# Altium PCB PCB.PcbDoc (part 2 of 2)
Units mm, origin at the board's own origin, x right, y up, seen from the top; angles counter-clockwise.
Board outline 210 x 83 mm, 4 copper layers (Top Layer, Inner Top, Inner Bottom, Bottom Layer), stack 1.536 mm thick; 158 components, 82 nets, 475 pads, 389 vias.
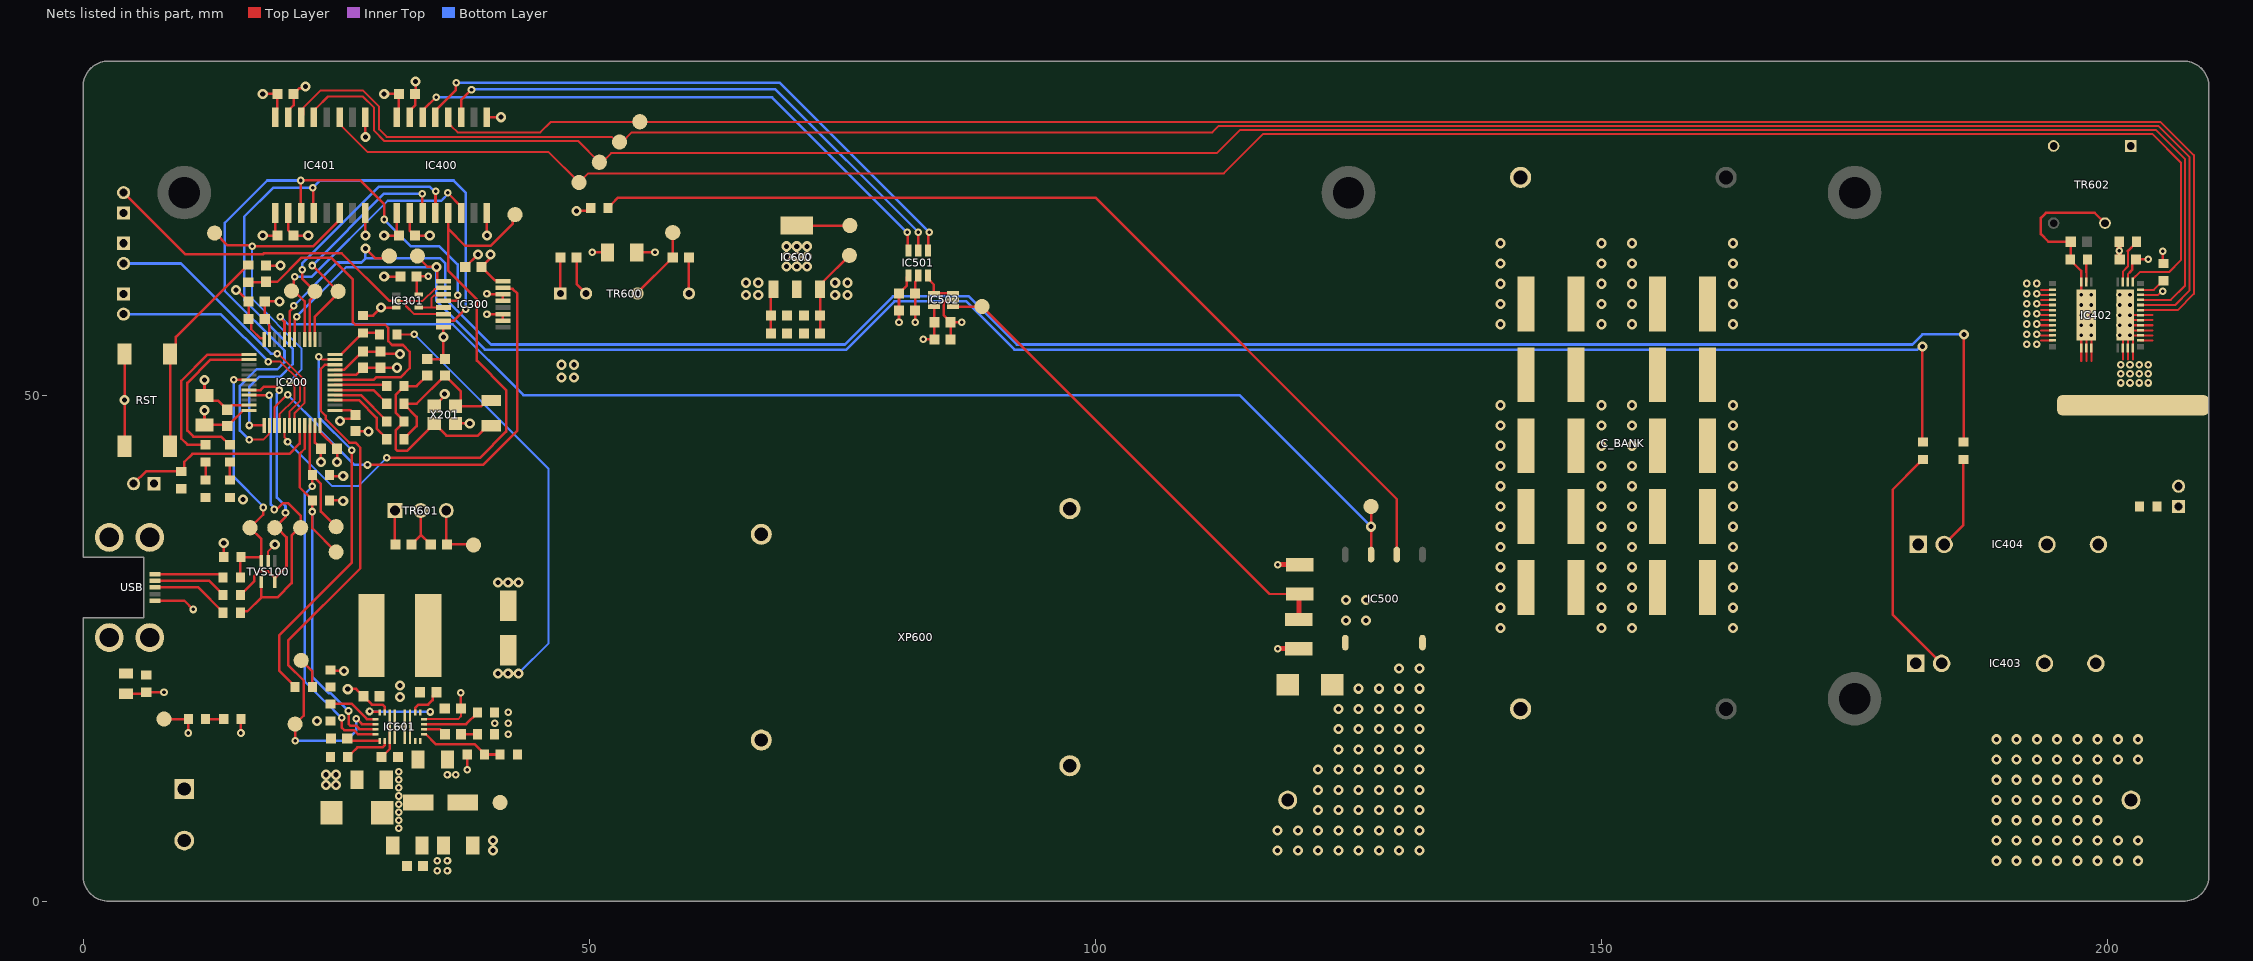
[diagram p4: the nets of this part, all layers, seen from the top]

## Via types
v1: diameter 1, hole 0.5, Top Layer to Bottom Layer, 257 vias
v2: diameter 0.75, hole 0.35, Top Layer to Bottom Layer, 132 vias

## Nets (pads, with @x,y where several pads share a name; then routed paths per layer and width w, separated by ;. In a path a pad name is that pad's centre, name@x,y a point inside that pad or via, vN(x,y) a via of type N, cw(c..) or ccw(c..) an arc to the next point about the centre after c; other vN are vias at no path point) (continued)
AGND: AGND.TP C401.2 C403.1 C405.2 C500.2 C501.1 C502.2 C503.1 C504.1 C505.1 C506.1 C507.1 C508.1 C509.1 C510.1 C511.1 C512.1 C513.1 C601.1 C604.2 C605.1 C606.1 C609.1 C610.1 C_BANK.1 IC400.9 IC400.15 IC401.9 IC401.15 IC402.18 IC402.19 IC402.20 IC402.22 IC402.23 IC402.24 IC402.25 IC402.26 IC402.27 IC402.31 IC402.42 IC404.3 IC501.2 IC502.2 IC600.2 IC600.4 R400.1 R402.1 R502.1 R_BLEED.1 TR600.6 TR602.1 XP600.4 | length 64.7
  Top Layer w0.2: 201.485,53.512 IC402.18@201.485,54.65 201.485,57.65 IC402.42@201.735,57.9 ; 201.985,53.514 IC402.19@201.985,54.65 201.985,55.9 v2(202.2,55.9) IC402.42@202.485,55.9 ; 202.485,53.5 IC402.20@202.485,54.65 IC402.42@202.485,55.9 ; IC402.22@203.25,55.4 204.4,55.4 ; IC402.31@203.25,59.9 204.978,59.9 205.328,60.25 v2(205.45,60.25) ; 204.4,55.9 IC402.23@203.25,55.9 IC402.42@202.485,55.9 ; 204.4,56.4 IC402.24@203.25,56.4 IC402.42@202.485,56.4 ; 204.4,56.9 IC402.25@203.25,56.9 IC402.42@202.485,56.9 ; 204.4,57.4 IC402.26@203.25,57.4 IC402.42@201.735,57.4 ; 204.4,57.9 IC402.27@203.25,57.9 v2(202.2,57.9) IC402.42@201.735,57.9 ; IC402.42@201.735,57.4 201.735,56.9 v2(202.2,56.9) IC402.42@202.485,56.9 ; IC402.42@201.735,57.4 IC402.42@201.735,57.9 ; IC402.42@202.485,55.9 IC402.42@202.485,56.4 ; IC402.42@202.485,56.4 IC402.42@202.485,56.9
  Top Layer w0.25: IC401.15@20.27,77.45 20.27,78.1 20.8,78.63 C401.2@20.8,79.75 21.381,80.331 21.831,80.331 v1(21.975,80.475) ; v1(27.89,75.5) IC401.9@27.89,77.45 ; IC400.15@32.27,77.45 32.27,78.1 32.47,78.3 32.475,78.3 32.8,78.625 C405.2@32.8,79.75 ; C405.2@32.85,79.8 v1(32.85,80.975) ; IC400.9@39.89,77.45 v1(41.3,77.45) ; C604.2@54.7,64.1 v2(56.5,64.1) ; TR600.6@59.85,60.035 C601.1@59.85,63.6 ; IC600.4@70.5,66.75 AGND.TP@75.75,66.75 ; v2(82.2,57.2) C501.1@82.2,58.35 C500.2@82.2,60.05 82.2,61.2 82.5,61.5 IC501.2@82.5,61.8 ; C502.2@85.7,55.5 C503.1@85.7,57.2 ; IC502.2@85.95,59.4 85.85,59.3 85.2,59.3 85,59.1 85,57.9 C503.1@85.7,57.2 ; v2(86.8,57.2) C503.1@85.7,57.2 ; v2(205.45,64.2) 205.45,63.05 R400.1@205.5,63
  Top Layer w0.5: v2(118,24.95) R502.1@120.1,24.95 ; R402.1@201.135,65.15 v2(201.135,64.25) 201.135,63.45 C403.1@201.185,63.4
  Inner Top w0.5: v2(201.135,64.25) v2@201.164,64.221
  other v1: 189,4 191,4 193,4 195,4 197,4 199,4 201,4 203,4 189,6 191,6 193,6 195,6 197,6 199,6 201,6 203,6 189,8 191,8 193,8 195,8 197,8 199,8 189,10 191,10 193,10 195,10 197,10 199,10 189,12 191,12 193,12 195,12 197,12 199,12 189,14 191,14 193,14 195,14 197,14 199,14 201,14 203,14 189,16 191,16 193,16 195,16 197,16 199,16 201,16 203,16 140,27 163,27 140,29 163,29 140,31 163,31 140,33 163,33 140,35 163,35 140,37 163,37 140,39 163,39 140,41 163,41 140,43 163,43 140,45 163,45 140,47 163,47 140,49 163,49 140,57 163,57 140,59 163,59 140,61 163,61 69.5,62.7 70.5,62.7 71.5,62.7 140,63 163,63 69.5,63.7 70.5,63.7 71.5,63.7 69.5,64.7 70.5,64.7 71.5,64.7 140,65 163,65
  other v2: 201.3,51.2 202.2,51.2 203.1,51.2 204,51.2 201.3,52.1 202.2,52.1 203.1,52.1 204,52.1 201.3,53 202.2,53 203.1,53 204,53 201.2,55.9 201.2,56.9 201.2,57.9 201.2,58.9 202.2,58.9 201.2,59.9 202.2,59.9
BOOT0: BOOT.2 IC200.44 R207.2 | length 20.3
  Top Layer w0.25: BOOT.2@5,41.25 6.25,42.5 9.65,42.5 R207.2@9.7,42.45 10,42.75 10,43.4 10.8,44.2 20.4,44.2 21.4,45.2 IC200.44@21.4,47.012
COM: IC403.3 IC404.4 R105.1
COM_N: COM_N.TP IC200.19 R404.2 | length 194.9
  Top Layer w0.25: IC200.19@20.4,55.488 20.4,58.265 20.825,58.69 v2(20.825,58.825) ; v1(27.89,64.5) 28.89,63.5 29.25,63.5 29.261,63.511 30.011,63.511 COM_N.TP@30.25,63.75 ; R404.2@185.75,45.35 185.8,45.4 v1(185.8,56)
  Bottom Layer w0.25: v2(20.825,58.825) 25.098,63.098 27.488,63.098 27.89,63.5 28,63.5 ; v1(27.89,64.5) 27.89,63.61 28,63.5 ; v1(185.8,56) 181.697,56 180.697,55 92.25,55 87.5,59.75 80,59.75 75.25,55 40.3,55 35.8,59.5 35.8,63 35.3,63.5 28,63.5
COM_P: COM_P.TP IC200.18 IC300.1 R403.2 | length 188.2
  Top Layer w0.25: IC200.18@20.9,55.488 20.9,57.442 21.1,57.642 v2(21.1,57.75) ; COM_P.TP@33.028,63.75 33.028,63.675 34.025,62.678 34.87,62.678 v1(34.9,62.648) 34.983,62.565 34.983,61.352 35.083,61.252 IC300.1@35.596,61.252 ; v1(181.7,54.8) 181.7,45.4 R403.2@181.75,45.35
  Bottom Layer w0.25: v2(21.1,57.75) 25.998,62.648 v1(34.9,62.648) 34.9,59.3 39.7,54.5 75.4,54.5 80.15,59.25 87.25,59.25 92,54.5 181.197,54.5 181.497,54.8 v1(181.7,54.8)
DBG_LED1: IC200.26 R204.2 | length 16.5
  Top Layer w0.25: R204.2@14.5,45.1 14.45,45.1 13.65,45.9 10.9,45.9 10.3,46.5 10.3,51.2 12.6,53.5 IC200.26@16.412,53.5
DBG_LED2: IC200.25 R203.2 | length 16.1
  Top Layer w0.25: R203.2@12.1,45.1 10.3,45.1 9.7,45.7 9.7,51.4 12.3,54 IC200.25@16.412,54
EN_BB: IC200.11 R604.1 | length 39.2
  Top Layer w0.2: v2(23.275,53.775) 23.342,53.775 23.617,53.5 IC200.11@24.888,53.5
  Top Layer w0.25: R604.1@20.95,21.15 20.95,21.2 19.4,22.75 19.4,26.3 26.55,33.45 v2@26.55,44.471
  Bottom Layer w0.25: v2(23.275,53.775) 23.275,47.825 v2(26.55,44.55)
EN_SW: EN_SW.TP IC200.41 IC400.5 | length 60.3
  Top Layer w0.2: IC200.41@19.9,47.012 19.9,45.822 20.2,45.522 v2(20.2,45.4)
  Top Layer w0.25: v2@29.984,43.8 39.2,43.8 41.8,46.4 41.8,50.5 38.9,53.4 38.9,59.453 36.08,62.273 36.08,66.423 ; IC400.5@36.08,68 36.08,66.423 ; EN_SW.TP@42.675,67.825 42.455,67.605 42.455,66.955 40.25,64.75 37.753,64.75 36.08,66.423
  Bottom Layer w0.2: v2(20.2,45.4) 24.6,41 27.2,41 v2(30.011,43.811)
EN_SW_ISO: IC400.12 IC402.28 TP403.TP | length 194.8
  Top Layer w0.2: IC400.12@36.08,77.45 36.08,76.8 36.305,76.575 36.375,76.575 37.005,75.945 45.167,75.945 46.222,77 TP403.TP@55,77 205.2,77 208.5,73.7 208.5,60 206.9,58.4 IC402.28@203.25,58.4
GND: C100.1 C200.1 C201.1 C202.1 C203.1 C204.1 C205.1 C206.1 C207.1 C208.1 C209.1 C210.1 C300.1 C301.1 C400.1 C404.1 C600.1 C602.1 C603.1 C604.1 C611.1 C612.1 C613.2 C614.1 C615.2 C616.2 C618.1 C619.1 C620.1 C621.1 C622.2 CON_PWR.1 D1.2 D2.2 IC200.8 IC200.23 IC200.35 IC200.47 IC300.8 IC300.10 IC300.11 IC300.13 IC300.14 IC301.3 IC400.2 IC400.8 IC401.2 IC401.8 IC403.1 IC404.1 IC601.9 IC601.17 PULSE.1 PWR.2 R103.1 R104.1 R205.1 R207.1 R603.2 R605.1 R606.2 R607.1 R608.1 RST.3 RST.4 TR600.1 TR601.2 TRIG.1 TVS100.2 USB.5 V_READY.1 X201.2 X201.4 XP600.2 | length 94.9
  Top Layer w0.2: TVS100.2@18.281,33.608 18.281,34.565 v1(18.941,35.225) ; IC601.17@33.7,18 37.05,18 37.325,18.275 C614.1@37.325,19.025
  Top Layer w0.25: RST.4@4.106,44.95 v1(4.106,49.5) RST.3@4.106,54.05 ; C100.1@4.25,20.5 6.1,20.5 R104.1@6.25,20.65 v2(8,20.65) ; USB.5@7.11,29.7 10.001,29.7 v2(10.876,28.825) ; v1(12,51.5) C205.1@12,49.95 12.525,49.425 13.375,49.425 C202.1@14.25,48.55 14.7,49 IC200.35@16.412,49 ; R103.1@13.9,34 v1(13.9,35.4) ; v2(15.6,16.625) PWR.2@15.6,18 ; C208.1@18.075,62.8 v1(19.5,62.8) ; IC200.23@18.4,55.488 18.4,57.05 C204.1@17.95,57.5 C200.1@17.95,59.25 v1(19.4,59.25) ; IC401.2@20.27,68 20.27,66.28 C400.1@20.8,65.75 v1(22.25,65.75) ; IC200.47@22.9,47.012 22.9,45.3 C203.1@23.5,44.7 v1(23.5,43.4) ; IC200.8@24.888,52 26.95,52 C206.1@27.65,52.7 v1(31,52.7) ; C201.1@26.9,46.45 28.15,46.45 v1(28.2,46.4) ; R205.1@27.65,57.85 28.652,57.85 v1(29.45,58.648) 29.452,58.65 30.952,58.65 IC301.3@30.953,58.652 ; v1(27.89,65.75) IC401.8@27.89,68 ; v1(29.75,61.702) C301.1@31.353,61.702 ; IC400.2@32.27,68 32.27,66.28 C404.1@32.8,65.75 v1(34.25,65.75) ; C602.1@32.45,35.25 33.35,36.15 33.35,36.25 ; TR601.2@33.35,38.6 33.35,36.25 ; C210.1@34,53.55 C209.1@35.75,53.55 35.596,53.704 v1(35.596,55.748) IC300.8@35.596,56.702 ; C603.1@34.35,35.25 33.35,36.25 ; X201.4@34.7,48.9 35.726,49.926 v1(35.726,50.107) ; X201.2@36.8,47.2 v1(38.2,47.2) ; C614.1@37.325,19.025 v2(37.325,20.612) ; C300.1@37.753,62.648 39,63.895 v1(39,63.9) ; v1(39.89,65.75) IC400.8@39.89,68 ; v2(39.9,58) IC300.11@41.471,58.001 ; v2(39.9,60) 39.924,59.976 41.447,59.976 IC300.14@41.472,59.952 IC300.13@41.472,59.302 ; IC300.10@41.472,57.352 IC300.11@41.472,58.002 ; TR600.1@47.15,60.035 C600.1@47.15,63.6 ; v2(50.3,64.1) C604.1@51.8,64.1
  other v1: 40.5,5 40.5,6 23.1,17.8 31.3,20.175 31.3,21.3 41,31.5 42,31.5 43,31.5 15.8,39.7 47.25,51.75 48.5,51.75 47.25,53 48.5,53
  other v2: 31.2,7.2 31.2,8 31.2,8.8 31.2,9.6 31.2,10.4 31.2,11.2 31.2,12 36,12.5 36.8,12.5 31.2,12.8 42,16.5 40.65,17.6 42,17.6 42,18.662
HV: D601.2 IC500.8 R501.2 R_BLEED.2 | length 2.2
  Top Layer w0.5: v2(118,33.25) R501.2@120.2,33.25
  other v1: 118,5 120,5 122,5 124,5 126,5 128,5 130,5 132,5 118,7 120,7 122,7 124,7 126,7 128,7 130,7 132,7 122,9 124,9 126,9 128,9 130,9 132,9 122,11 124,11 126,11 128,11 130,11 132,11 122,13 124,13 126,13 128,13 130,13 132,13 124,15 126,15 128,15 130,15 132,15 124,17 126,17 128,17 130,17 132,17 124,19 126,19 128,19 130,19 132,19 126,21 128,21 130,21 132,21 130,23 132,23
HV_P: C504.2 C505.2 C506.2 C507.2 C508.2 C509.2 C510.2 C511.2 C512.2 C513.2 C_BANK.2 IC402.2 IC402.3 IC402.4 IC402.5 IC402.6 IC402.7 IC402.8 IC402.9 IC402.10 IC402.11 IC402.12 IC403.4 IC500.5 | length 12.6
  Top Layer w0.2: 193.4,55.4 IC402.12@194.55,55.4 ; 193.4,55.9 IC402.11@194.55,55.9 ; 193.4,56.4 IC402.10@194.55,56.4 ; 193.4,56.9 IC402.9@194.55,56.9 ; 193.4,57.4 IC402.8@194.55,57.4 ; 193.4,57.9 IC402.7@194.55,57.9 ; 193.4,58.4 IC402.6@194.55,58.4 ; 193.4,58.9 IC402.5@194.55,58.9 ; 193.4,59.4 IC402.4@194.55,59.4 ; 193.4,59.9 IC402.3@194.55,59.9 ; 193.4,60.4 IC402.2@194.55,60.4
  other v1: 150,27 153,27 124.75,27.75 126.75,27.75 150,29 153,29 124.75,29.75 126.75,29.75 150,31 153,31 150,33 153,33 150,35 153,35 150,37 153,37 150,39 153,39 150,41 153,41 150,43 153,43 150,45 153,45 150,47 153,47 150,49 153,49 150,57 153,57 150,59 153,59 150,61 153,61 150,63 153,63 150,65 153,65
  other v2: 192,55.025 193,55.025 192,56.025 193,56.025 192,57.025 193,57.025 192,58.025 193,58.025 192,59.025 193,59.025 192,60.025 193,60.025 192,61.025 193,61.025
I2C.SCL: IC200.45 IC601.3 R200.1 SCL.TP | length 39.7
  Top Layer w0.25: IC200.45@21.9,47.012 21.9,44.7 21.4,44.2 21.4,40.9 22.65,39.65 R200.1@22.65,39.6 v2(22.65,38.5) 22.65,36.85 SCL.TP@25,34.5 ; v2(26.225,18.8) 26.25,18.775 26.25,17.496 26.396,17.35 26.95,17.35 27.3,17 IC601.3@28.9,17
  Bottom Layer w0.25: v2@22.65,38.493 22.65,22.175 24.29,20.535 24.49,20.535 v2(26.225,18.8)
I2C.SDA: IC200.46 IC601.4 R201.1 SDA.TP | length 41.5
  Top Layer w0.25: IC200.46@22.4,47.012 22.4,42.35 R201.1@22.65,42.1 R201.1@22.65,42.05 ; v2(22.65,41) R201.1@22.65,42.05 ; SDA.TP@25,37 23.5,38.5 23.5,41.2 R201.1@22.65,42.05 ; v2(25.55,18.125) 25.55,17.15 25.8,16.9 26.75,16.9 27.15,16.5 IC601.4@28.9,16.5
  Bottom Layer w0.25: v2(22.65,41) 21.9,40.25 21.9,21.725 23.865,19.76 23.915,19.76 v2(25.55,18.125)
INT: IC200.39 IC300.15 | length 45.9
  Top Layer w0.2: IC200.39@18.9,47.012 18.9,48.775 20.15,50.025 v2(20.225,50.025)
  Top Layer w0.25: v2(28.1,43.1) 39.5,43.1 42.9,46.5 42.9,60.035 42.433,60.502 41.572,60.502 IC300.15@41.472,60.602
  Bottom Layer w0.25: v2(20.225,50.025) 23.401,46.849 23.401,46.524 26.825,43.1 v2(28.1,43.1)
MODE_BB: EN_MD.TP IC200.10 IC601.2 | length 54
  Top Layer w0.25: v2(20.95,15.85) EN_MD.TP@20.95,17.5 ; EN_MD.TP@20.95,17.5 21.8,18.35 21.8,21.8 20.25,23.35 20.25,25.75 27.4,32.9 27.4,44.8 26.9,45.3 26.3,45.3 23.975,47.625 23.975,47.95 23.483,48.442 23.483,52.583 23.9,53 IC200.10@24.888,53 ; v2(27,18.05) 27.55,17.5 IC601.2@28.9,17.5
  Bottom Layer w0.25: v2(20.95,15.85) 26,15.85 27,16.85 v2(27,18.05)
NetC100_2: C100.2 R104.2 USB.MH1 USB.MH2 USB.MH3 USB.MH4 | length 0.2
  Top Layer w0.25: R104.2@6.1,22.5 R104.2@6.25,22.35
NetC209_2: C209.2 R208.1 R210.1 X200.2 X201.3 | length 17.4
  Top Layer w0.25: R208.1@31.7,45.644 31.7,45.694 32.944,46.938 32.944,47.85 31.7,49.094 R210.1@31.7,49.144 32.944,49.144 C209.2@35.75,51.95 37.325,50.375 37.325,49.425 X201.3@36.8,48.9 39.35,48.9 39.925,49.475 X200.2@40.325,49.475
NetC210_2: C210.2 R209.1 R211.1 X200.1 X201.1 | length 21.5
  Top Layer w0.25: C210.2@34,51.95 32.944,50.894 R211.1@31.7,50.894 31.7,50.844 30.9,50.044 30.9,48.244 31.7,47.444 R209.1@31.7,47.394 31.7,47.344 30.9,46.544 30.9,44.646 31.046,44.5 32,44.5 X201.1@34.7,47.2 35.25,46.65 35.9,46 39,46 39.5,46.5 39.5,46.55 39.925,46.975 X200.1@40.325,46.975
NetC607_1: C607.1 IC601.20 | length 5
  Top Layer w0.25: v1(26.15,20.95) 26.175,20.975 26.975,20.975 C607.1@27.7,20.25 28.525,19.425 29.6,19.425 29.8,19.225 IC601.20@29.8,18.65
NetC607_2: C607.2 IC601.8 L600.1
NetC608_1: C608.1 IC601.19 | length 3.4
  Top Layer w0.25: IC601.19@32.8,18.65 32.805,18.655 32.805,19.105 33.125,19.425 34.075,19.425 34.525,19.875 34.525,20.275 C608.1@34.9,20.65
NetC608_2: C608.2 IC601.10 L600.2
NetC614_2: C614.2 IC601.18 IC601.21 | length 7.1
  Top Layer w0.25: v2(28.3,18.75) 28.35,18.7 29.295,18.7 29.3,18.695 IC601.21@29.3,18.65
  Bottom Layer w0.25: v2(28.3,18.75) 28.325,18.725 34.275,18.725 v2(34.3,18.7)
NetC616_1: C616.1 IC601.5 | length 3.3
  Top Layer w0.25: C616.1@26.1,16.075 26.325,15.85 IC601.5@29.3,15.85
NetC617_1: C617.1 R608.2 | length 1.6
  Top Layer w0.25: C617.1@37.35,16.5 R608.2@38.95,16.5
NetC617_2: C617.2 IC601.15 | length 2.3
  Top Layer w0.25: IC601.15@33.7,17 35.25,17 C617.2@35.75,16.5
NetCOM_1: COM.1 COM.2 R105.2
NetD1_1: D1.1 R204.1 | length 1.8
  Top Layer w0.25: D1.1@14.5,41.6 R204.1@14.5,43.4
NetD2_1: D2.1 R203.1 | length 1.8
  Top Layer w0.25: D2.1@12.1,41.6 R203.1@12.1,43.4
NetD601_1: D601.1 XP600.3
NetEN_BB_TP: EN_BB.TP IC601.1 R601.1 R604.2 R605.2 | length 8.2
  Top Layer w0.25: EN_BB.TP@21.55,23.8 22.65,22.7 R604.2@22.65,21.15 ; R605.2@24.45,19.5 26.55,19.5 28.05,18 IC601.1@28.9,18
NetIC200_3: IC200.3 R208.2 | length 7.4
  Top Layer w0.25: IC200.3@24.888,49.5 27.244,49.5 29,47.744 29,46.694 30,45.694 R208.2@30,45.644
NetIC200_4: IC200.4 R209.2 | length 6.2
  Top Layer w0.25: IC200.4@24.888,50 27.444,50 30,47.444 R209.2@30,47.394
NetIC200_5: IC200.5 R210.2 | length 5.7
  Top Layer w0.25: IC200.5@24.888,50.5 28.694,50.5 30,49.194 R210.2@30,49.144
NetIC200_6: IC200.6 R211.2 | length 5.2
  Top Layer w0.25: IC200.6@24.888,51 29.894,51 R211.2@30,50.894
NetIC300_3: IC300.3 IC300.5 IC301.4 | length 4.7
  Top Layer w0.2: IC301.4@33.153,58.652 34.4,58.652 ; IC300.5@35.577,58.652 34.4,58.652 ; IC300.3@35.596,59.952 35.496,59.852 34.703,59.852 34.4,59.548 34.4,58.652
NetIC402_32: IC402.32 R400.2 | length 2.6
  Top Layer w0.2: IC402.32@203.25,60.4 204.55,60.4 205.1,60.95 205.45,61.3 R400.2@205.5,61.3
NetIC402_36: IC402.36 R402.2 | length 4.6
  Top Layer w0.2: IC402.36@201.485,61.15 201.485,62.2 201.985,62.7 201.985,64.2
  Top Layer w0.25: 201.985,64.2 201.985,64.25 202.835,65.1 R402.2@202.835,65.15
NetIC402_39: IC402.39 R401.2 | length 2.4
  Top Layer w0.2: IC402.39@197.885,61.15 197.885,62.15 ; R401.2@197.885,63.4 R401.2@198,63.4
  Top Layer w0.25: 197.885,62.15 197.885,63.285 R401.2@198,63.4
NetIC403_2: IC403.2 R403.1 | length 23.4
  Top Layer w0.25: R403.1@181.75,43.65 181.7,43.65 181.375,43.325 181.375,43.275 178.75,40.65 178.75,28.34 IC403.2@183.59,23.5
NetIC404_2: IC404.2 R404.1 | length 9.2
  Top Layer w0.25: IC404.2@183.84,35.25 185.75,37.16 R404.1@185.75,43.65
NetIC500_2: IC500.2 R500.1 | length 96.2
  Top Layer w0.25: R500.1@51.85,68.5 51.85,68.55 52.175,68.875 52.225,68.875 52.85,69.5 100,69.5 129.77,39.73 IC500.2@129.77,34.25
NetIC501_3: IC501.3 IC502.3 IC502.4 | length 3.9
  Top Layer w0.25: IC501.3@83.45,61.8 83.45,61.5 84.05,60.9 IC502.4@84.05,60.05 IC502.3@85.95,60.05
NetIC601_6: IC601.6 R606.1 | length 4.6
  Top Layer w0.25: R606.1@26.15,14.25 26.15,14.3 26.475,14.625 26.525,14.625 27.1,15.2 29.6,15.2 29.8,15.4 IC601.6@29.8,15.85
NetIC601_14: IC601.14 R602.2 R603.1 | length 8.4
  Top Layer w0.25: IC601.14@33.7,16.5 33.87,16.5 34.87,15.5 38.7,15.5 39.65,14.55 R602.2@39.65,14.5 R603.1@41.2,14.5
NetIC601_16: IC601.16 R607.2 | length 5.8
  Top Layer w0.25: IC601.16@33.7,17.5 37.838,17.5 38.95,18.612 R607.2@38.95,18.662
NetPWR_1: PWR.1 R600.1 | length 1.8
  Top Layer w0.25: R600.1@12.1,18 PWR.1@13.9,18
NetR100_1: R100.1 USB.1 | length 12.4
  Top Layer w0.25: USB.1@7.11,32.3 7.135,32.3 7.435,32.3 R100.1@13.541,32.3 ; R100.1@13.541,32.3 R100.1@13.841,32 ; R100.1@13.541,32.3 R100.1@13.841,32 ; R100.1@13.541,32.3 R100.1@13.841,32 ; R100.1@13.541,32.3 R100.1@13.841,32 ; R100.1@13.541,32.3 R100.1@13.841,32 ; R100.1@13.541,32.3 R100.1@13.841,32 ; R100.1@13.541,32.3 R100.1@13.841,32 ; R100.1@13.541,32.3 R100.1@13.841,32 ; R100.1@13.541,32.3 R100.1@13.841,32 ; R100.1@13.541,32.3 R100.1@13.841,32 ; R100.1@13.541,32.3 R100.1@13.841,32 ; R100.1@13.541,32.3 R100.1@13.841,32 ; R100.1@13.541,32.3 R100.1@13.841,32 ; R100.1@13.541,32.3 R100.1@13.841,32
NetR101_2: R101.2 USB.2 | length 7.3
  Top Layer w0.25: USB.2@7.11,31.65 7.135,31.65 7.435,31.65 12.491,31.65 13.841,30.3 R101.2@13.841,30.25
NetR102_2: R102.2 USB.3 | length 7.8
  Top Layer w0.25: USB.3@7.11,31 7.135,31 7.435,31 11.391,31 13.841,28.55 R102.2@13.841,28.5
NetR206_2: R206.2 RST.1 RST.2 | length 21.1
  Top Layer w0.25: RST.2@8.606,44.95 RST.1@8.606,54.05 9.181,54.625 9.181,55.756 16.275,62.85 R206.2@16.325,62.85
nFLT: IC200.40 IC401.6 nFLT.TP | length 34.8
  Top Layer w0.2: IC200.40@19.4,47.012 19.4,48.1 20.9,49.6 20.9,50.854 v2(20.4,51.354)
  Top Layer w0.25: nFLT.TP@13,66 13.08,66 14.284,64.796 16.604,64.796 v2@16.695,64.705 ; v2(16.7,64.7) 22.7,64.7 IC401.6@25.216,67.216
  Bottom Layer w0.2: v2(16.7,64.7) 16.7,59.5 21.6,54.6 21.6,52.554 v2(20.4,51.354)
nFLT_ISO: IC401.11 IC402.34 TP400.TP | length 203.6
  Top Layer w0.2: IC401.11@25.35,77.45 25.575,77.225 25.575,76.545 28.095,74.025 45.975,74.025 TP400.TP@49,71 49.9,71.9 112.7,71.9 116.6,75.8 204.4,75.8 207.225,72.975 207.225,63.325 206.05,62.15 203.168,62.15 202.485,61.467 IC402.34@202.485,61.15
NRST: C208.2 IC200.7 R206.1 | length 33.5
  Top Layer w0.25: R206.1@16.325,61.15 18.025,61.15 C208.2@18.075,61.2 19.2,61.2 21.55,63.55 24.541,63.55 26.625,61.466 26.625,57.225 26.9,56.95 29.85,56.95 30.15,56.65 30.15,55.325 30.525,54.95 31.6,54.95 32.275,54.275 32.275,52.675 31.35,51.75 28.944,51.75 28.694,51.5 IC200.7@24.888,51.5
PULSE_EXT: IC300.2 IC300.6 IC301.2 PULSE.2 | length 41.2
  Top Layer w0.2: IC301.2@30.953,59.302 31.9,59.302 ; IC300.6@35.596,58.002 32.698,58.002 31.9,58.8 31.9,59.302 ; IC300.2@35.596,60.602 35.471,60.477 34.728,60.477 33.553,59.302 31.9,59.302
  Top Layer w0.25: PULSE.2@4,70 10.075,63.925 17.78,63.925 17.855,64 25.559,64 30.257,59.302 IC301.2@30.953,59.302
PULSE_H: IC200.38 IC300.4 IC401.3 | length 67.5
  Top Layer w0.2: v2(16.4,45.6) 17.8,45.6 18.35,46.15 18.35,46.962 IC200.38@18.4,47.012
  Top Layer w0.25: v2(21.5,71.2) 21.52,71.22 27.398,71.22 29.75,68.868 v2(29.75,67.346) ; v2@21.518,71.2 21.518,68.04 IC401.3@21.54,68.018 ; IC300.4@35.596,59.302 36.854,59.302 37,59.448 v2(37,59.851)
  Bottom Layer w0.25: v2(16.4,45.6) 15.5,46.5 15.5,50.9 17.154,52.554 19.2,52.554 19.9,53.254 19.9,54.4 14,60.3 14,67 18.2,71.2 v2(21.5,71.2) ; v2(29.75,67.346) 32.396,64.7 35.2,64.7 37,62.9 v2(37,59.851)
PULSE_H_ISO: IC401.14 IC402.29 TP401.TP | length 211.8
  Top Layer w0.2: IC401.14@21.54,77.45 21.765,77.675 21.765,78.39 23.475,80.1 27.65,80.1 29.25,78.5 29.25,76.25 30,75.5 52.233,75.5 TP401.TP@52.733,75 ; TP401.TP@53,75 53.267,75 54.217,75.95 111.55,75.95 112.2,76.6 205,76.6 208.1,73.5 208.1,60.35 206.65,58.9 IC402.29@203.25,58.9
PULSE_L: IC200.37 IC300.7 IC401.4 | length 67.7
  Top Layer w0.25: v2@16.412,47.012 IC200.37@17.9,47.012 ; v2(22.7,70.5) 22.755,70.445 22.755,68.055 IC401.4@22.81,68 ; IC300.7@35.596,57.352 36.652,57.352 v2(37.8,58.5)
  Bottom Layer w0.25: v2(16.4,47) 16.4,50.8 17.4,51.8 19.45,51.8 20.7,53.05 20.7,54.6 15.925,59.375 15.925,67.625 18.8,70.5 v2(22.7,70.5) 23.4,71.2 36.6,71.2 37.8,70 v2(37.8,58.5)
PULSE_L_ISO: IC401.13 IC402.30 TP402.TP | length 210.1
  Top Layer w0.2: IC401.13@22.81,77.45 23.035,77.675 23.035,78.335 24.2,79.5 27.625,79.5 28.75,78.375 28.75,76.117 29.767,75.1 48.9,75.1 TP402.TP@51,73 51.267,73 52.167,73.9 112,73.9 114.3,76.2 204.754,76.2 207.65,73.304 207.65,60.825 206.225,59.4 IC402.30@203.25,59.4
SET: IC200.20 IC500.3 SET.TP | length 123.5
  Top Layer w0.25: v2(19.5,57.75) 19.5,57.642 19.9,57.242 IC200.20@19.9,55.488 ; IC500.3@127.23,34.25 v1(127.23,37) SET.TP@127.23,39
  Bottom Layer w0.25: v2(19.5,57.75) 20.25,57 36.5,57 43.5,50 114.23,50 v1(127.23,37)
SPI_ADC.MISO: IC200.16 IC400.6 MISO.TP | length 28.2
  Top Layer w0.25: v2(20.9,61.7) 20.823,61.623 20.823,60.498 MISO.TP@20.6,60.275 20.625,60.25 20.9,60.25 21.9,59.25 IC200.16@21.9,55.488 ; v2(36.025,69.975) 37.35,68.65 IC400.6@37.35,68
  Bottom Layer w0.25: v2(20.9,61.7) 22.6,61.7 30.1,69.2 35.4,69.2 35.577,69.377 35.577,69.391 36.025,69.84 v2(36.025,69.975)
SPI_ADC.nCS: IC200.14 IC400.3 nCS.TP | length 25.1
  Top Layer w0.25: v2(22.65,62.8) 25.162,60.287 25.2,60.287 25.2,60.05 22.9,57.75 IC200.14@22.9,55.488 ; v2(33.5,69.9) 33.5,68.04 IC400.3@33.54,68
  Bottom Layer w0.25: v2(22.65,62.8) 29.75,69.9 v2(33.5,69.9)
SPI_ADC.SCK: IC200.15 IC400.4 SCK.TP | length 26.9
  Top Layer w0.25: v2(21.65,62.4) 21.65,61.5 SCK.TP@22.9,60.25 22.9,59.912 22.4,59.412 IC200.15@22.4,55.488 ; IC400.4@34.81,68 34.817,68.008 34.817,70.118 v2(34.825,70.125)
  Bottom Layer w0.25: v2(21.65,62.4) 21.65,63 29.25,70.6 34.239,70.6 34.714,70.125 v2(34.825,70.125)
SPI_ADC_ISO.CLK: IC400.13 IC501.4 | length 59
  Top Layer w0.25: IC400.13@34.81,77.45 34.81,78.1 36.81,80.1 36.81,80.81 v2(36.85,80.85) ; IC501.4@83.45,64.3 83.512,64.362 83.512,66.038 v2(83.575,66.1)
  Bottom Layer w0.25: v2(36.85,80.85) 36.875,80.875 68.8,80.875 v2(83.575,66.1)
SPI_ADC_ISO.DATA: IC400.11 IC501.5 | length 54.9
  Top Layer w0.25: IC400.11@37.35,77.45 37.35,79.15 v2(38.375,80.175) ; IC501.5@82.5,64.3 v2(82.5,66.1)
  Bottom Layer w0.25: v2(38.375,80.175) 38.4,80.2 68.4,80.2 v2(82.5,66.1)
SPI_ADC_ISO.nCS: IC400.14 IC501.6 | length 56.4
  Top Layer w0.25: IC400.14@33.54,77.45 33.74,77.65 33.74,78.3 34.865,79.425 v2(34.9,79.425) ; v2(81.4,66.075) 81.475,66 81.475,64.375 IC501.6@81.55,64.3
  Bottom Layer w0.25: v2(34.9,79.425) 34.925,79.4 68.075,79.4 v2(81.4,66.075)
SW: C402.1 IC402.14 IC402.15 IC402.16 IC402.40 IC402.41 PIN.1 R401.1 TR602.7 | length 27.2
  Top Layer w0.2: 197.385,53.35 IC402.14@197.385,54.65 v2(197.385,55.9) ; v2(197.385,59.9) IC402.40@197.385,61.15 197.385,62.15 ; 197.88,53.35 IC402.15@197.88,54.65 ; IC402.41@197.88,57.9 IC402.15@197.88,54.65 ; IC402.15@197.885,54.65 IC402.15@197.88,54.65 ; 198.385,53.35 IC402.16@198.385,54.65 v2(198.385,55.9)
  Top Layer w0.25: 197.385,62.15 197.385,62.265 196.3,63.35 R401.1@196.3,63.4 196.35,63.45 C402.1@196.35,65.15 194.15,65.15 193.4,65.9 193.4,67.5 193.9,68 198.72,68 TR602.7@199.73,66.99
  other v2: 197.385,56.9 198.385,56.9 197.385,57.9 198.385,57.9 197.385,58.9 198.385,58.9 198.385,59.9
TRIG: IC200.43 TRIG.2 | length 27.5
  Top Layer w0.2: v2(19.2,54.1) 19.266,54.1 21.9,51.466 21.9,49.234 20.9,48.234 IC200.43@20.9,47.012
  Bottom Layer w0.25: TRIG.2@4,63 9.666,63 18.566,54.1 v2(19.2,54.1)
USB.D_N: IC200.32 R101.1 TVS100.5 USB_M.TP | length 29.2
  Top Layer w0.254: R101.1@15.541,30.25 15.541,30.3 15.864,30.623 15.914,30.623 16.9,31.609 16.9,32.1 17.4,32.6 18.272,32.6 TVS100.5@18.941,31.931 ; IC200.32@16.412,50.5 17.542,50.5 17.875,50.833 19.003,50.833 19.336,50.5 v2(19.4,50.5) ; TVS100.5@18.941,31.525 TVS100.5@18.941,31.931 ; v2@20,38.6 20,37.959 USB_M.TP@18.941,36.9 19.15,36.9 20.1,35.95 20.1,33.09 TVS100.5@18.941,31.931
  Bottom Layer w0.254: v2(19.4,50.5) 19.4,50.366 19.154,50.12 19.154,39.871 20,39.025 v2@20,38.6
  other v2: 20,38.375
USB.D_P: IC200.33 R102.1 TVS100.4 USB_P.TP | length 31.6
  Top Layer w0.254: R102.1@15.541,28.5 15.674,28.633 16.223,28.633 17.62,30.03 ; IC200.33@16.412,50 v2(18.4,50) ; TVS100.4@17.62,31.525 17.62,30.03 ; v2@19.108,38.7 19.709,39.302 20.291,39.302 21.5,38.092 USB_P.TP@21.5,36.9 21.35,36.9 20.6,36.15 20.6,31.43 19.2,30.03 17.62,30.03
  Bottom Layer w0.254: v2(18.4,50) 18.4,49.866 18.55,49.716 18.55,39.192 v2@19.042,38.7
  other v2: 18.908,38.7
USB.VBUS: IC200.30 R100.2 R103.2 TVS100.3 VBUS.TP | length 25.7
  Top Layer w0.25: v2(14.9,51.5) IC200.30@16.412,51.5 ; R100.2@15.541,32 15.541,33.941 R103.2@15.6,34 17.567,34 TVS100.3@17.62,33.947 ; TVS100.3@17.62,33.608 TVS100.3@17.62,33.947 ; v2(17.8,38.9) 17.8,38.2 VBUS.TP@16.5,36.9 17.62,35.78 TVS100.3@17.62,33.947
  Bottom Layer w0.25: v2(14.9,51.5) 14.9,41.9 17.8,39 v2(17.8,38.9)
V_CTRL: C615.1 C618.2 C619.2 C620.2 C621.2 C622.1 IC601.11 IC601.12 IC601.13 R202.2 R602.1 VCTRL.TP XP600.1 | length 43.5
  Top Layer w0.2: R202.2@31,56 v2(32.7,56)
  Top Layer w0.25: v2(37.95,12.975) R602.1@37.95,14.5
  Bottom Layer w0.2: v2(32.7,56) 46,42.7 46,25.5 v1(43,22.5)
  other v1: 41,22.5 42,22.5
  other v2: 35,3 36,3 35,4 36,4
V_CTRL_3V3: IC200.12 R202.1 R205.2 | length 5.4
  Top Layer w0.25: IC200.12@24.888,54 25.475,54 27.275,55.799 27.275,55.825 27.6,56.15 R205.2@27.65,56.15 29.15,56.15 R202.1@29.3,56
V_MEAS: IC502.1 R501.1 R502.2 V_MEAS.TP | length 48.5
  Top Layer w0.2: V_MEAS.TP@88.8,58.75 117.2,30.35 120.1,30.35 R501.1@120.2,30.35
  Top Layer w0.25: IC502.1@85.95,58.75 V_MEAS.TP@88.8,58.75
  Top Layer w0.5: R502.2@120.1,27.85 R501.1@120.1,30.35
V_READY: IC200.42 V_READY.2 | length 25
  Top Layer w0.2: v2(18.3,53.3) 19.5,53.3 21.446,51.354 21.446,49.446 20.4,48.4 IC200.42@20.4,47.012
  Bottom Layer w0.25: V_READY.2@4,58 13.6,58 v2(18.3,53.3)
VDD3V3: 3V3.TP BOOT.1 C200.2 C201.2 C202.2 C203.2 C204.2 C205.2 C206.2 C207.2 C300.2 C301.2 C400.2 C404.2 C603.2 IC200.1 IC200.9 IC200.24 IC200.36 IC200.48 IC300.16 IC301.5 IC400.1 IC401.1 R200.2 R201.2 R500.2 TR601.3 | length 54.4
  Top Layer w0.25: v1(12,48.5) C205.2@12,47.05 14.15,47.05 C202.2@14.25,46.95 14.625,47.325 14.649,47.325 15.824,48.5 IC200.36@16.412,48.5 ; v1(15.1,60.4) 15.2,60.4 C200.2@16.35,59.25 C204.2@16.35,57.5 16.617,57.233 16.617,56.508 17.521,55.604 17.875,55.604 17.9,55.579 IC200.24@17.9,55.488 ; v1(17.75,65.75) C400.2@19.2,65.75 19,65.95 IC401.1@19,68 ; IC200.48@23.4,47.012 23.425,46.987 23.425,46.375 C203.2@25.1,44.7 v1(25.1,43.4) ; R200.2@24.35,39.6 25.65,39.6 v1(25.7,39.55) ; R201.2@24.35,42.1 24.45,42 v1(25.7,42) ; IC200.1@24.888,48.5 26.45,48.5 27.275,47.675 25.834,47.675 25.603,47.444 v1(25.4,47.444) ; IC200.9@24.888,52.5 24.913,52.525 25.825,52.525 27.6,54.3 C206.2@27.65,54.3 C207.2@29.4,54.3 29.625,54.075 v1(31.3,54.075) ; v1(29.75,65.75) C404.2@31.2,65.75 31,65.95 IC400.1@31,68 ; IC301.5@33.153,59.952 33.028,59.952 32.953,60.027 C301.2@32.953,61.702 32.977,61.725 v2(34.1,61.725) ; TR601.3@35.89,38.6 35.89,35.31 C603.2@35.95,35.25 3V3.TP@38.575,35.25 ; v1(40.25,63.895) 40.106,63.751 40.106,63.401 C300.2@39.353,62.648 40.65,61.352 41.372,61.352 IC300.16@41.472,61.252 ; v1(48.752,68.203) 49.853,68.203 R500.2@50.15,68.5
VDD5V: 5V.TP C401.1 C405.1 C500.1 C501.2 C502.1 C503.2 C605.2 C606.2 IC400.16 IC401.16 IC501.1 IC502.5 IC600.3 | length 25.9
  Top Layer w0.25: v1(17.75,79.75) C401.1@19.2,79.75 19.2,78.3 19,78.1 IC401.16@19,77.45 ; v1(29.75,79.75) C405.1@31.2,79.75 31.2,78.3 31,78.1 IC400.16@31,77.45 ; C605.2@72.8,56.1 C606.2@72.8,57.85 IC600.3@72.8,60.45 73.15,60.8 73.15,61.25 5V.TP@75.7,63.8 ; v2(80.6,57.2) C501.2@80.6,58.35 C500.1@80.6,60.05 81.375,60.825 81.375,61.625 IC501.1@81.55,61.8 ; v2(83,55.5) C502.1@84.1,55.5 C503.2@84.1,57.2 84.1,58.7 IC502.5@84.05,58.75
  other v1: 74.3,59.9 75.5,59.9 74.3,61.1 75.5,61.1
VDD12V: 12V.TP C403.2 C601.2 C609.2 C610.2 IC402.35 IC600.1 TR600.4 TR602.4 | length 15.9
  Top Layer w0.2: IC402.35@201.985,61.15 201.985,61.935 202.2,62.15
  Top Layer w0.25: TR600.4@54.77,60.035 54.77,60.12 C601.2@58.25,63.6 12V.TP@58.25,66.05 ; C609.2@67.95,56.1 C610.2@67.95,57.85 67.95,60.45 IC600.1@68.2,60.45 ; 202.2,62.15 202.41,62.36 202.41,63.025 C403.2@202.785,63.4 v2(204,63.4)
  other v1: 65.5,59.9 66.7,59.9 65.5,61.1 66.7,61.1
VDDIN: C600.2 C602.2 C611.2 C612.2 C613.1 CON_PWR.2 IC601.7 R600.2 R601.2 TR600.2 TR601.1 VDDIN.TP | length 15.8
  Top Layer w0.25: VDDIN.TP@8,18 R600.2@10.4,18 v2(10.4,16.625) ; R601.2@24.45,22.85 24.55,22.75 v1(25.775,22.75) ; C612.2@29.5,14.25 30.3,15.05 IC601.7@30.3,17.25 ; TR601.1@30.81,38.6 30.81,35.29 C602.2@30.85,35.25 ; C600.2@48.75,63.6 48.75,60.975 TR600.2@49.69,60.035
  other v1: 24,11.5 25,11.5 24,12.5 25,12.5
pads on no net: C_BANK.3 C_BANK.4 IC200.2 IC200.13 IC200.17 IC200.21 IC200.22 IC200.27 IC200.28 IC200.29 IC200.31 IC200.34 IC300.9 IC300.12 IC301.1 IC400.7 IC400.10 IC401.5 IC401.7 IC401.10 IC401.12 IC402.1 IC402.13 IC402.17 IC402.21 IC402.33 IC402.37 IC500.1 IC500.4 MH1.1 MH2.1 MH3.1 MH4.1 TVS100.1 USB.4

## Polygon pours and split planes (outlines as drawn)
HV_P on Inner Bottom "HV_P_L03_P038" (solid, pour order 38): 135,26 123,26 123,32 135,32 135,65 198,65 198,58.025 208,58.025 208,2 135,2
VDD12V on Inner Bottom "POLY_VDD12V" (solid, pour order 32): 86,81 86,52 68,52 68,71 53,71 53,49 90,49 90,67 200,67 200,60 208,60 208,81
VDD3V3 on Inner Bottom "PLOY_VDD3V3" (solid, pour order 4): 28,42 28,38 24,38 24,20 2,20 2,71 51,71 51,67 41,67 41,37 32,37 32,42
VDD5V on Inner Bottom "POLY_VDD5V" (solid, pour order 33): 5,81 5,74 69,74 69,53 85,53 85,81
VDDIN on Inner Bottom "POLY_VDDIN" (solid, pour order 2): 29,41 29,37 25,37 25,19 2,19 2,2 32,2 32,32 51,32 51,66 42,66 42,36 30.97,36 30.97,41
V_CTRL on Inner Bottom "POLY_V_CTRL" (solid, pour order 3): 33,31 33,2 90,2 90,47 52,47 52,31
HV on Inner Bottom "HV_L03_P039" (solid, pour order 39): 133,24 121,24 121,34 133,34 133,65 92,65 92,2 133,2
AGND on Inner Top "AGND" (solid, pour order 10): 55,74 5,74 5,81 208,81 208,2.54 79,2.54 79,52 55,52
GND on Inner Top "GND" (solid, remove dead copper, pour order 1): 2,71 2,2 75,2 75,48 51,48 51,71
GND on Inner Top "GND_L02_P029" (solid, pour order 29): 37.8,6.5 37.8,4.5 41,4.5 41,6.5
SW on Inner Top "SW_L02_P000" (solid, pour order 0): 196.9,61.4 196.9,54.15 198.9,54.15 198.9,61.4
HV_P on Top Layer "HV_P_L01_P047" (solid, pour order 47): 146,66 146,26 157,26 157,66
AGND on Top Layer "AGND_L01_P049" (solid, pour order 49): 159,26 164,26 164,66 159,66
AGND on Top Layer "AGND_L01_P048" (solid, pour order 48): 144,66 139,66 139,26 144,26
GND on Top Layer "GND_L01_P014" (solid, pour order 14): 25.2,18.5 25.2,13.5 22.5,13.5 22.5,18.5
HV on Top Layer "HV_L01_P040" (solid, pour order 40): 128,25 131,25 131,27 134,27 134,4 117,4 117,17 122,17 122,23 128,23
NetC607_2 on Top Layer "NETC607_2_L01_P007" (solid, pour order 7): 30.925,19.3 30.25,19.975 30.25,30.75 26.75,30.75 26.75,21.75 27.5,21.75 29.625,19.625 30.125,19.625 30.675,19.075 30.675,15.55 30.925,15.55
NetC608_2 on Top Layer "NETC608_2_L01_P008" (solid, pour order 8): 31.675,19.3 32.35,19.975 32.35,30.75 35.85,30.75 35.85,21.75 35.1,21.75 32.975,19.625 32.475,19.625 31.925,19.075 31.925,15.55 31.675,15.55
GND on Top Layer "GND_L01_P009" (solid, pour order 9): 30.8,21.8 30.8,19.5 31.1,19.2 31.1,15.4 30.5,14.8 30.1,14.8 30.1,13.7 29.3,12.9 29.3,10.9 28.3,9.9 28.3,5.9 31.5,2.7 32.5,2.7 32.5,4 31.9,4.6 31.9,7.1 32.6,7.8 34.3,7.8 35,8.5 35,10.5 34.5,11 33,11 31.5,12.5 31.5,19.2 31.8,19.5 31.8,21.8
V_CTRL on Top Layer "V_CTRL_L01_P011" (solid, pour order 11): 32.425,16.5 32.725,16.2 33.5,16.2 34,15.7 34,14.8 34,13.5 36.5,11 42.5,11 42.5,8.5 39,8.5 36.5,6 36.5,2.7 32.8,2.7 32.8,6.5 34.6,6.5 35.6,7.5 35.6,10.4 34.5,11.5 33.6,11.5 32.175,12.925 32.175,18.95 32.425,18.95
GND on Top Layer "GND_L01_P012" (solid, pour order 12): 41.7,15.7 42.3,15.1 42.3,13.8 43.5,13.8 43.5,15.3 42.5,16.3 42.5,19.5 40,19.5 40,15.7
GND on Top Layer "GND_L01_P013" (solid, pour order 13): 37.2,14.4 36.6,15 35,15 35,13 36,12 37.2,12
NetEN_BB_TP on Top Layer "NETEN_BB_TP_L01_P015" (solid, pour order 15): 22,22 22,19 25.2,19 25.2,22
VDDIN on Top Layer "VDDIN_L01_P016" (solid, pour order 16): 27.7,11.9 29.95,14.15 29.95,14.8 28.5,14.8 26.9,13.2 23,13.2 23,7 27.7,7
NetC614_2 on Top Layer "NETC614_2_L01_P017" (solid, pour order 17): 36.475,18.275 36.475,19.775 34.925,19.775 34.15,19 33.18,19 33.18,18.275
GND on Top Layer "GND_L01_P022" (solid, pour order 22): 40.5,27.5 43.5,27.5 43.5,32 40.5,32
V_CTRL on Top Layer "V_CTRL_L01_P023" (solid, pour order 23): 43.5,26.5 40.5,26.5 40.5,22 43.5,22
AGND on Top Layer "AGND_L01_P024" (solid, pour order 24): 68.85,67.625 68.85,55.3 72.15,55.3 72.15,67.625
VDD12V on Top Layer "VDD12V_L01_P030" (solid, pour order 30): 64.5,62 64.5,59 67.95,59 67.95,62
NetD601_1 on Top Layer "NETD601_1_L01_P035" (solid, pour order 35): 95,10 95,23 120.1,23 120.1,18.75 101.25,18.75 101.25,10
GND on Top Layer "GND_L01_P041" (solid, pour order 41): 37.75,4.25 41.5,4.25 41.5,6.75 38.05,6.75 37.75,6.45
VDD5V on Top Layer "VDD5V_L01_P042" (solid, pour order 42): 76.5,62 76.5,59 73.05,59 73.05,62
AGND on Top Layer "AGND_L01_P046" (solid, pour order 46): 187.5,2.5 207.5,2.5 207.5,17.5 187.5,17.5
AGND on Top Layer "AGND_L01_P026" (solid, pour order 26): 200.9,53.65 200.9,50.8 206.15,50.8 206.15,58 204.15,58 204.15,53.65
SW on Top Layer "SW_L01_P005" (solid, pour order 5): 196.9,53.65 196.9,48 198.9,48 198.9,53.65
HV_P on Top Layer "HV_P_L01_P028" (solid, pour order 28): 193.65,61.65 191.15,61.65 191.15,54.15 193.65,54.15
HV_P on Top Layer "HV_P_L01_P044" (solid, pour order 44): 123.75,24 123.75,31.25 128.75,31.25 128.75,26.25 126.25,26.25 126.25,24
NetCOM_1 on Top Layer "NETCOM_1_L01_P045" (solid, pour order 45): 204.25,43 204.25,37.5 208.25,37.5 208.25,43
COM on Top Layer "COM_L01_P037" (solid, pour order 37): 203.75,37.5 203.75,43 191.25,43 191.25,21 203.75,21
NetC100_2 on Top Layer "NETC100_2_L01_P018" (solid, pour order 18): 0.3,27.5 9.8,27.5 9.8,21.9 0.3,21.9
GND on Top Layer "GND_L01_P020" (solid, pour order 20): 9.2,40.5 9.2,39 16.5,39 16.5,40.5
no net on Top Solder "NONET_L02_P-001" (solid): 2,80 2,76 3.5,76 3.5,80
NetC100_2 on Bottom Layer "NETC100_2_L04_P051" (solid, pour order 51): 0.3,34.5 6.59,34.5 6.59,27.5 0.3,27.5 0.3,21.9 9.8,21.9 9.8,38 0.3,38
GND on Bottom Layer "GND_L04_P036" (solid, pour order 36): 46,54 46,51 179,51 179,22 186,22 186,54

## Other copper
Top Layer:
  text "1" at 2.15,79.85 h1 r270
Inner Top:
  text "2" at 2.15,78.85 h1 r270
Inner Bottom:
  text "3" at 2.15,77.85 h1 r270
Bottom Layer:
  text "4" at 2.15,76.85 h1 r270

## Silkscreen, mask and mechanical layers (free items; w line width, h text height)
Top Overlay:
  drawing of 18 lines, arcs and shapes, not listed
  text "V1 2024" at 4.717,81.299 h1.5 r270
  text "by Jakov Sola" at 5.982,81.3 h1.5 r270
  text "BODY BASHER" at 7.217,81.3 h1.5 r270
  text "HV - 500V" at 100,55.056 h5
Board:
  lines w0.5: -0.25,2.54 ccw(c2.54,2.54) 2.54,-0.25 ; -0.25,2.54 -0.25,80.46 ; -0.25,2.54 -0.25,2.54 ; -0.25,2.54 -0.25,2.54 ; -0.25,80.46 cw(c2.54,80.46) 2.539,83.25 ; -0.25,80.46 -0.25,80.46 ; 2.54,-0.25 207.46,-0.25 ; 2.54,-0.25 2.54,-0.25 ; 2.54,-0.25 2.54,-0.25 ; 2.54,83.25 ccw(c2.54,83) 2.539,83.25 ; 2.54,83.25 ccw(c2.54,83) 2.539,83.25 ; 2.54,83.25 ccw(c2.54,80.46) 2.539,83.25 ; 2.54,83.25 207.46,83.25 ; 207.46,-0.25 ccw(c207.46,2.54) 210.25,2.539 ; 207.46,-0.25 207.46,-0.25 ; 207.46,-0.25 207.46,-0.25 ; 207.46,83.25 cw(c207.46,80.46) 207.461,83.25 ; 207.46,83.25 cw(c207.46,83) 207.461,83.25 ; 207.461,83.25 cw(c207.46,80.46) 210.25,80.461 ; 210.25,2.539 ccw(c210,2.54) 210.25,2.54 ; 210.25,2.539 ccw(c207.46,2.54) 210.25,2.54 ; 210.25,2.54 210.25,80.46 ; 210.25,80.46 ccw(c210,80.46) 210.25,80.461 ; 210.25,80.46 ccw(c207.46,80.46) 210.25,80.461

## Text inside footprints (layer, text, board x,y; h text height)
COM_N: Top Overlay "N" at 28.4,63.15 h1
COM_P: Top Overlay "P" at 34.4,63.198 h1
IC402: Top Overlay "*" at 193.242,60.265 h1.27; Top Assembly "*" at 195.223,60.265 h1.27
PIN: Top Overlay "HV - KEEP CLEAR" at 193.8,51.55 h1; Top Overlay "EDGE" at 211.85,48.65 h1 r90